# Altium PCB PCB1.PcbDoc
Units mm, origin at the board's own origin, x right, y up, seen from the top; angles counter-clockwise.
Board outline 90.04 x 76.2 mm, 4 copper layers (Top Layer, GND1, GND2, Bottom Layer), stack 0.699 mm thick; 34 components, 32 nets, 135 pads, 37 vias.
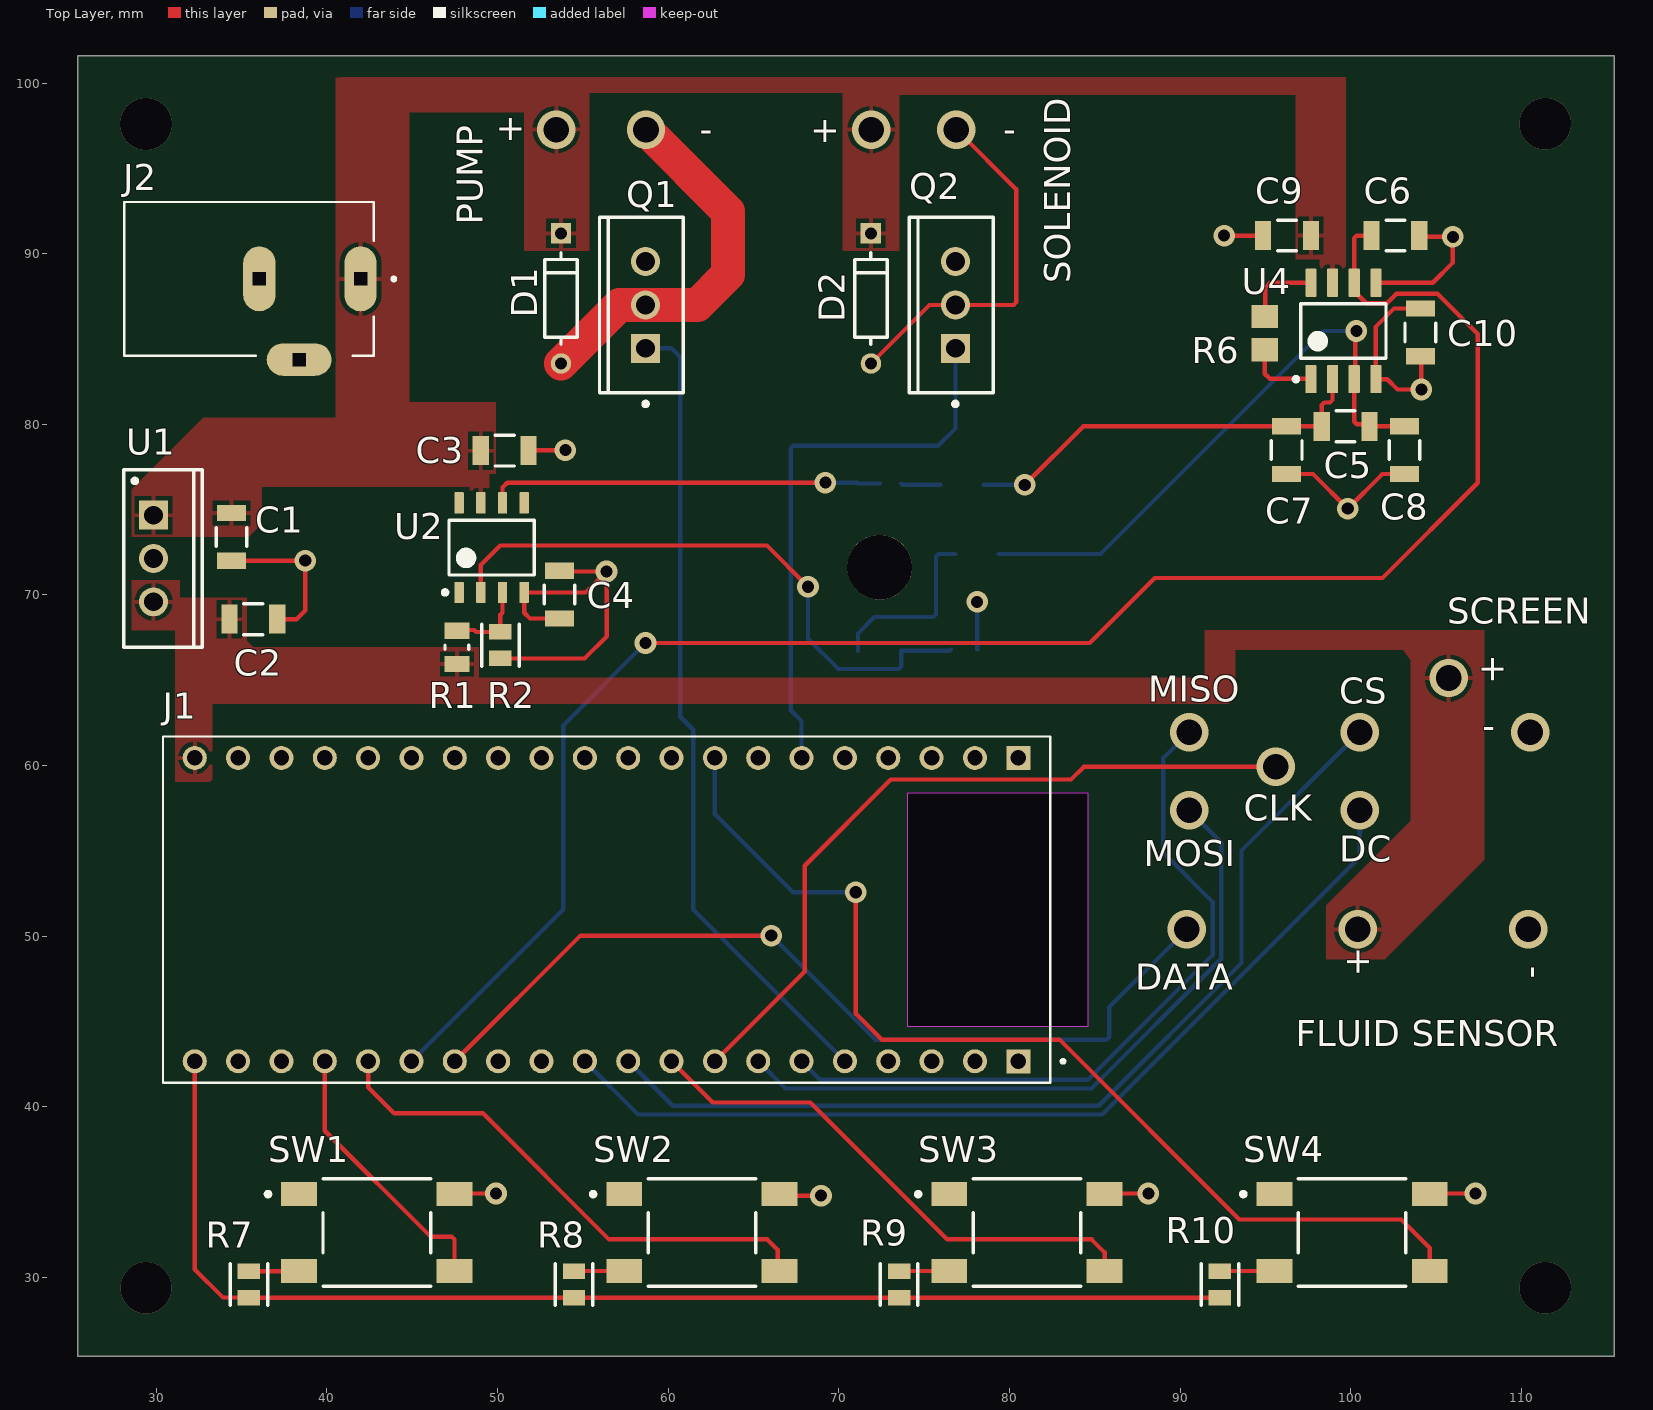
[diagram p0: Top Layer view]
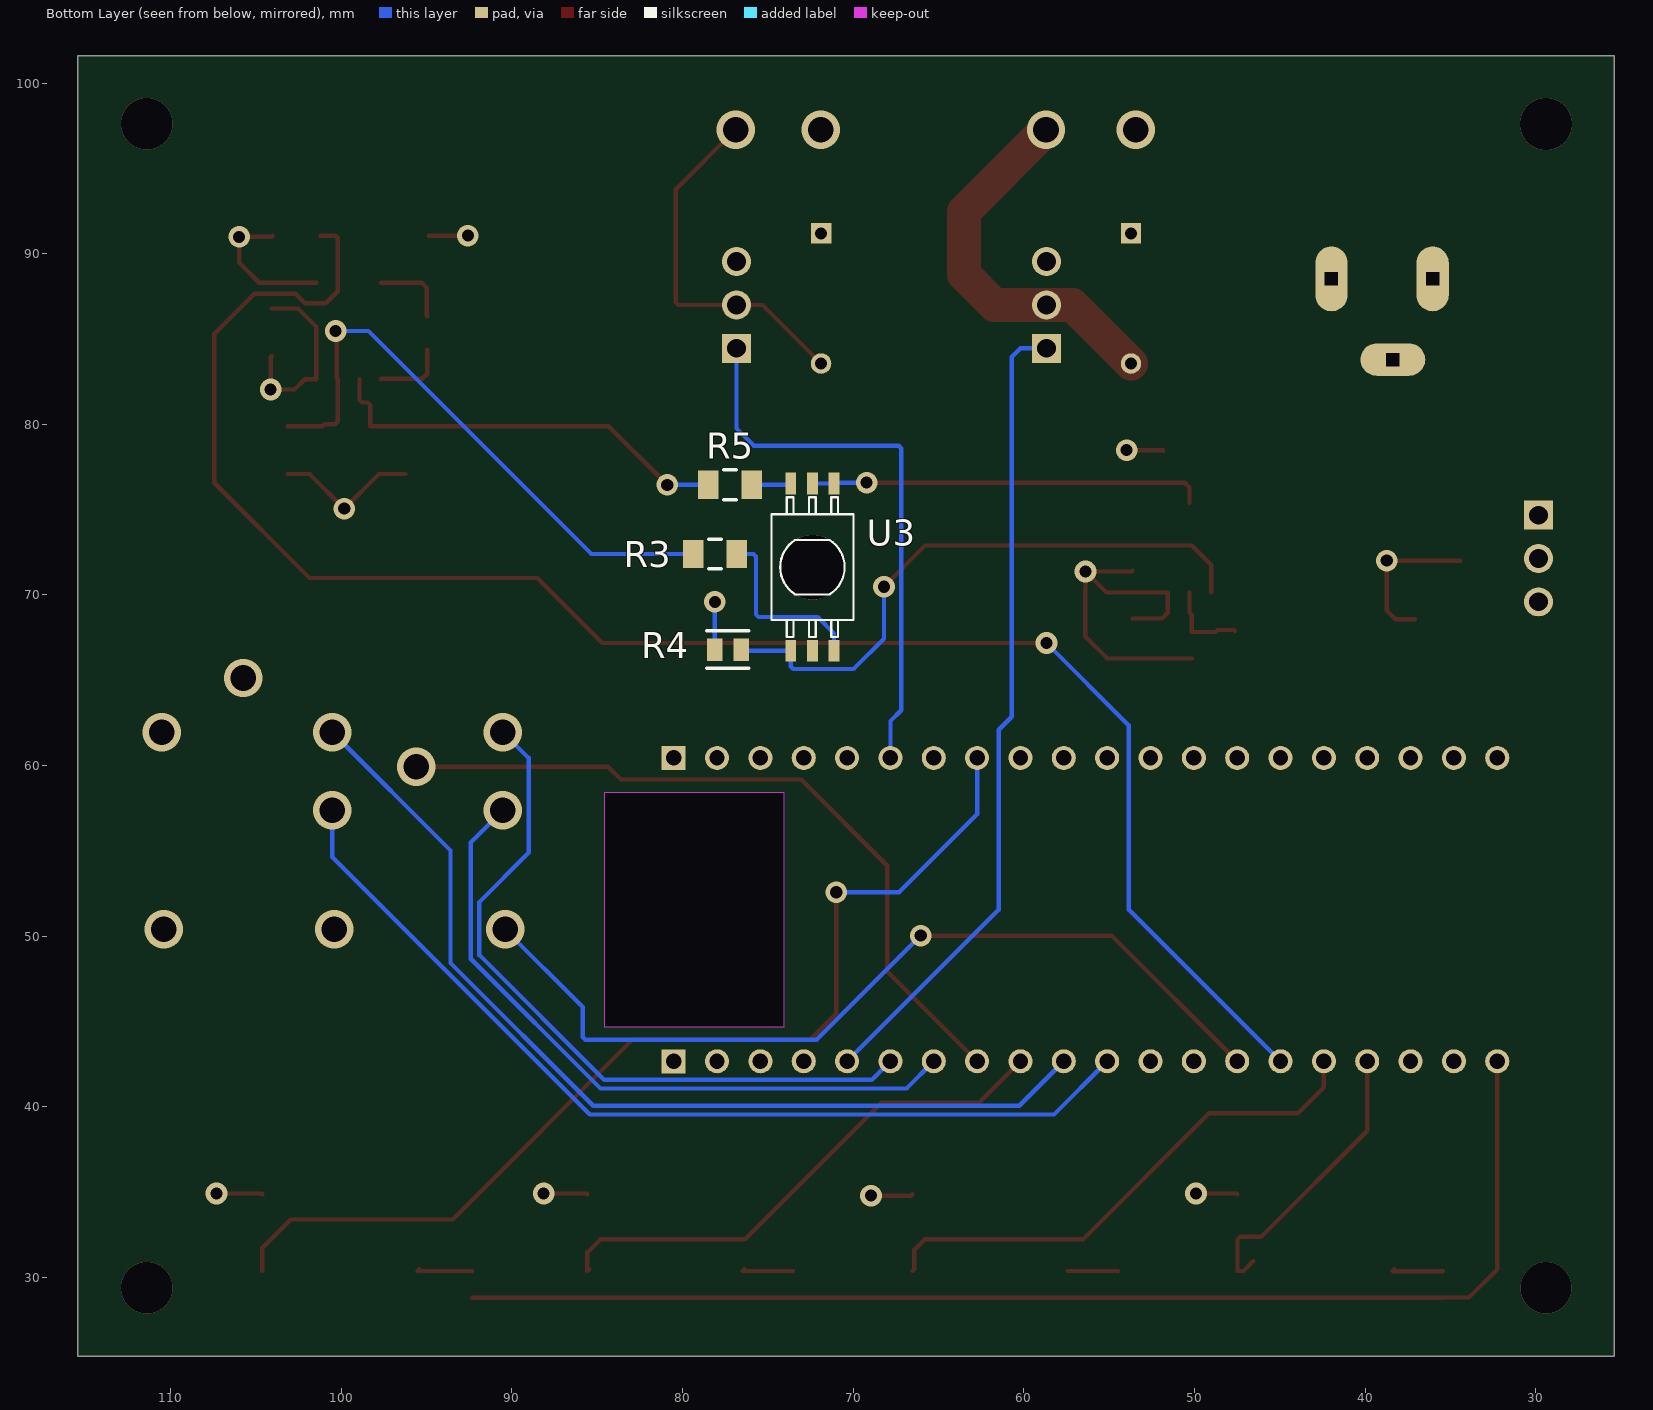
[diagram p1: Bottom Layer view, seen from below]
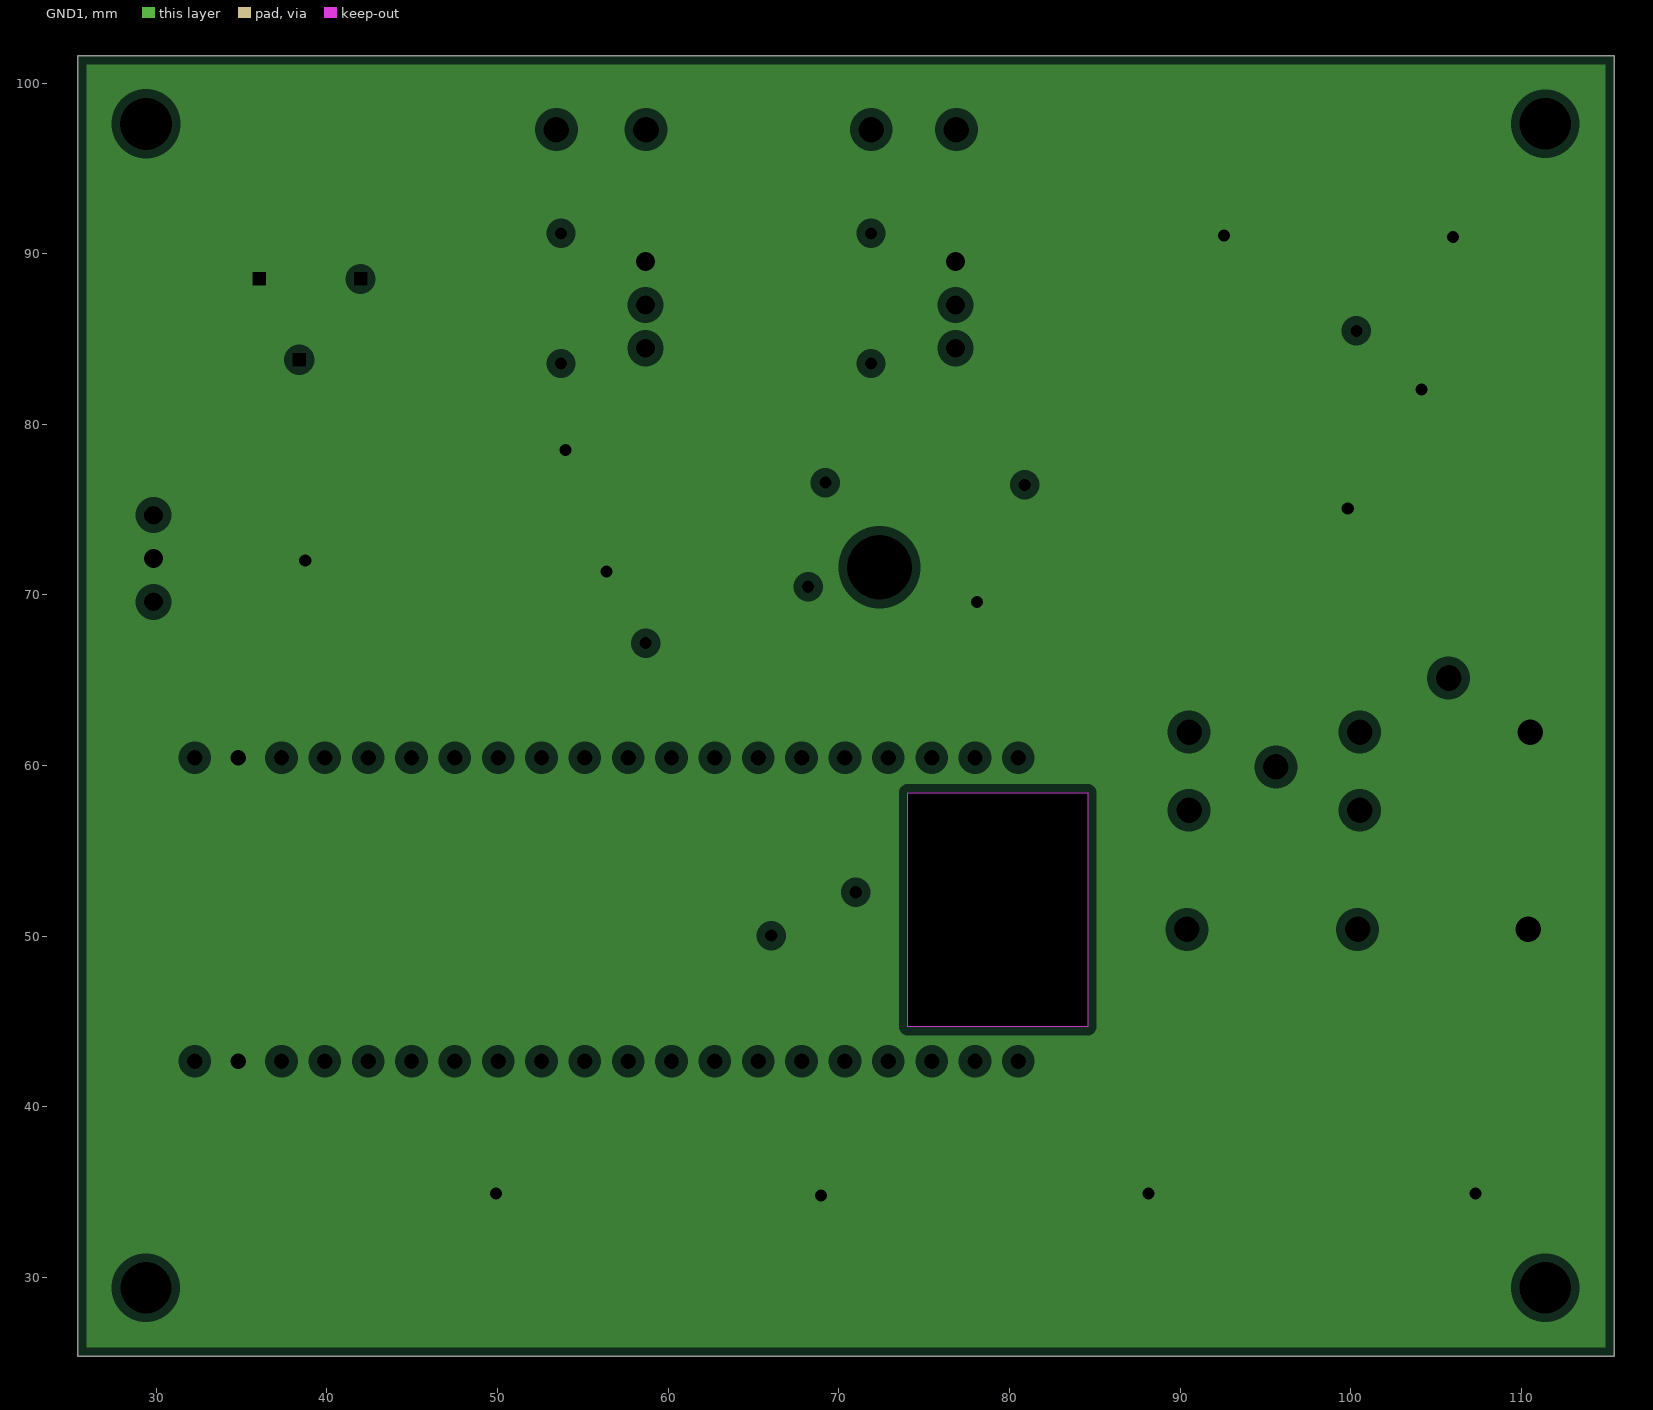
[diagram p2: GND1, clearances drawn from the general rule]
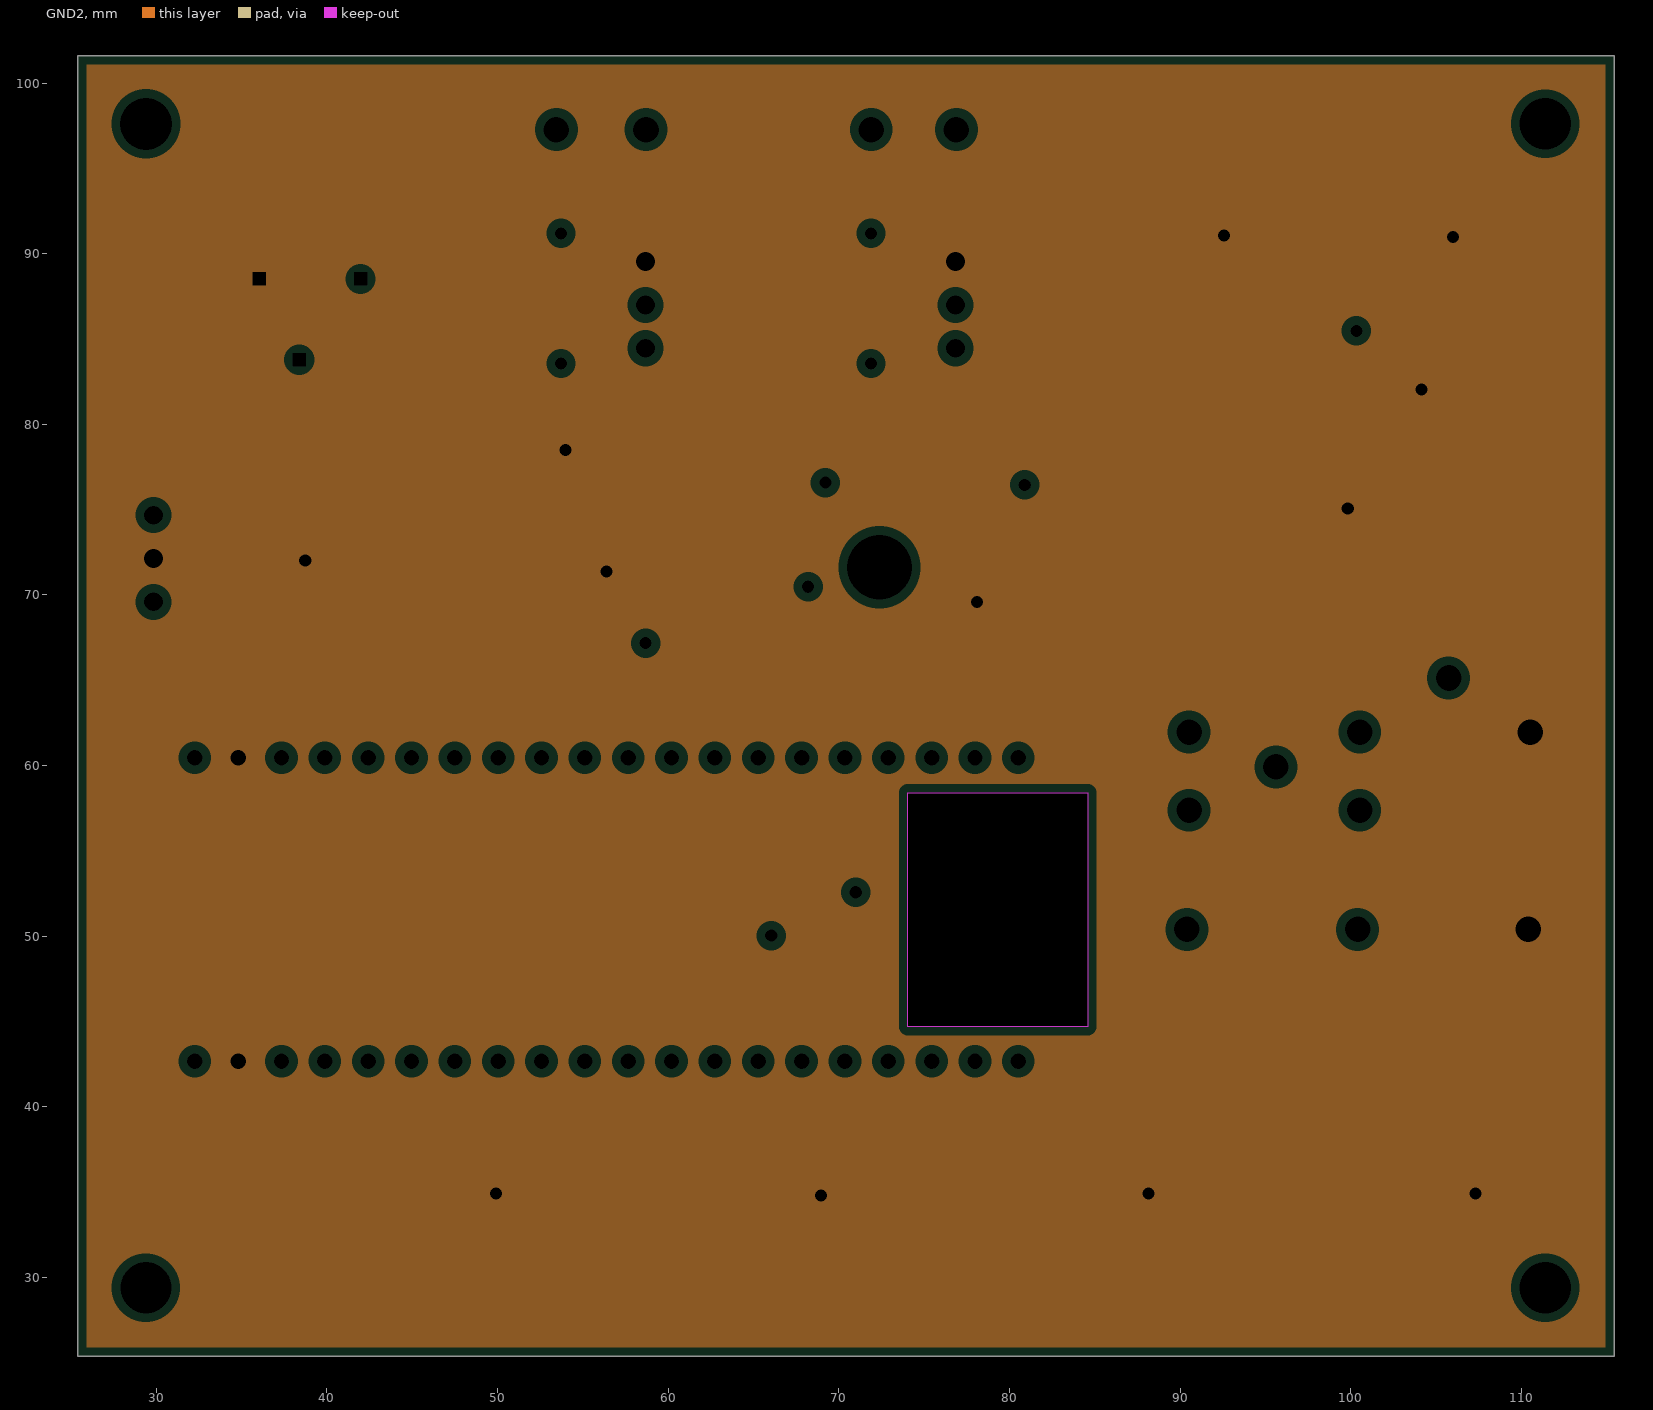
[diagram p3: GND2, clearances drawn from the general rule]
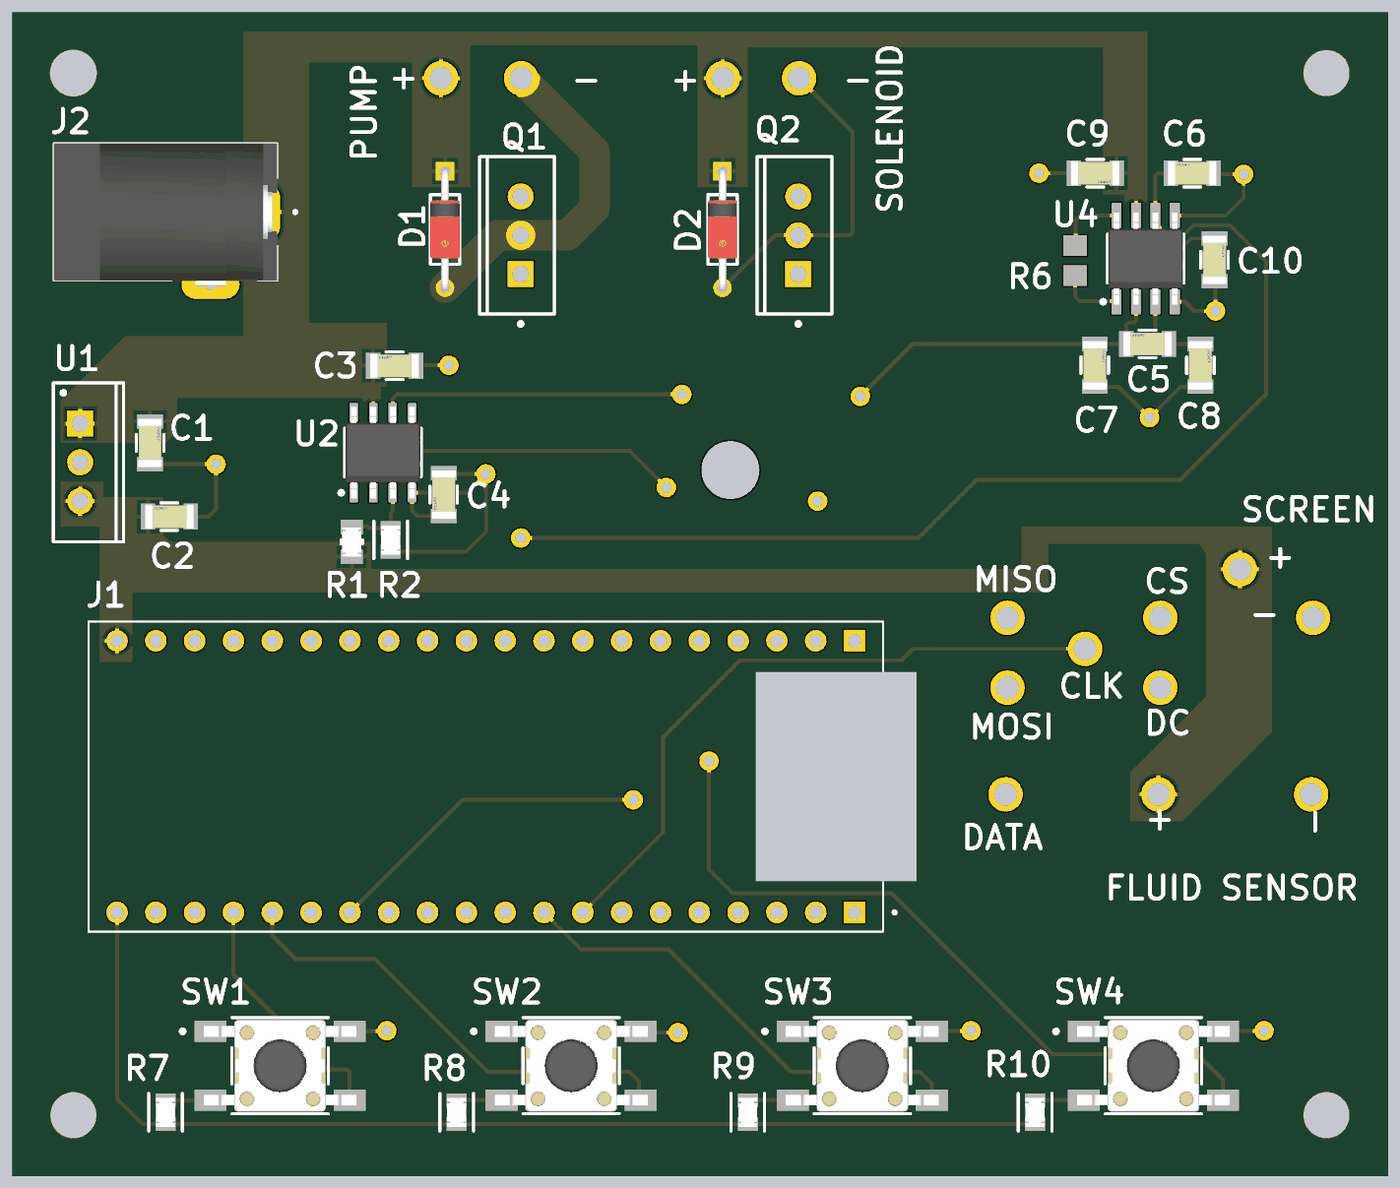
[diagram p4: 3D render of the assembled board from above, using the file's embedded part models]
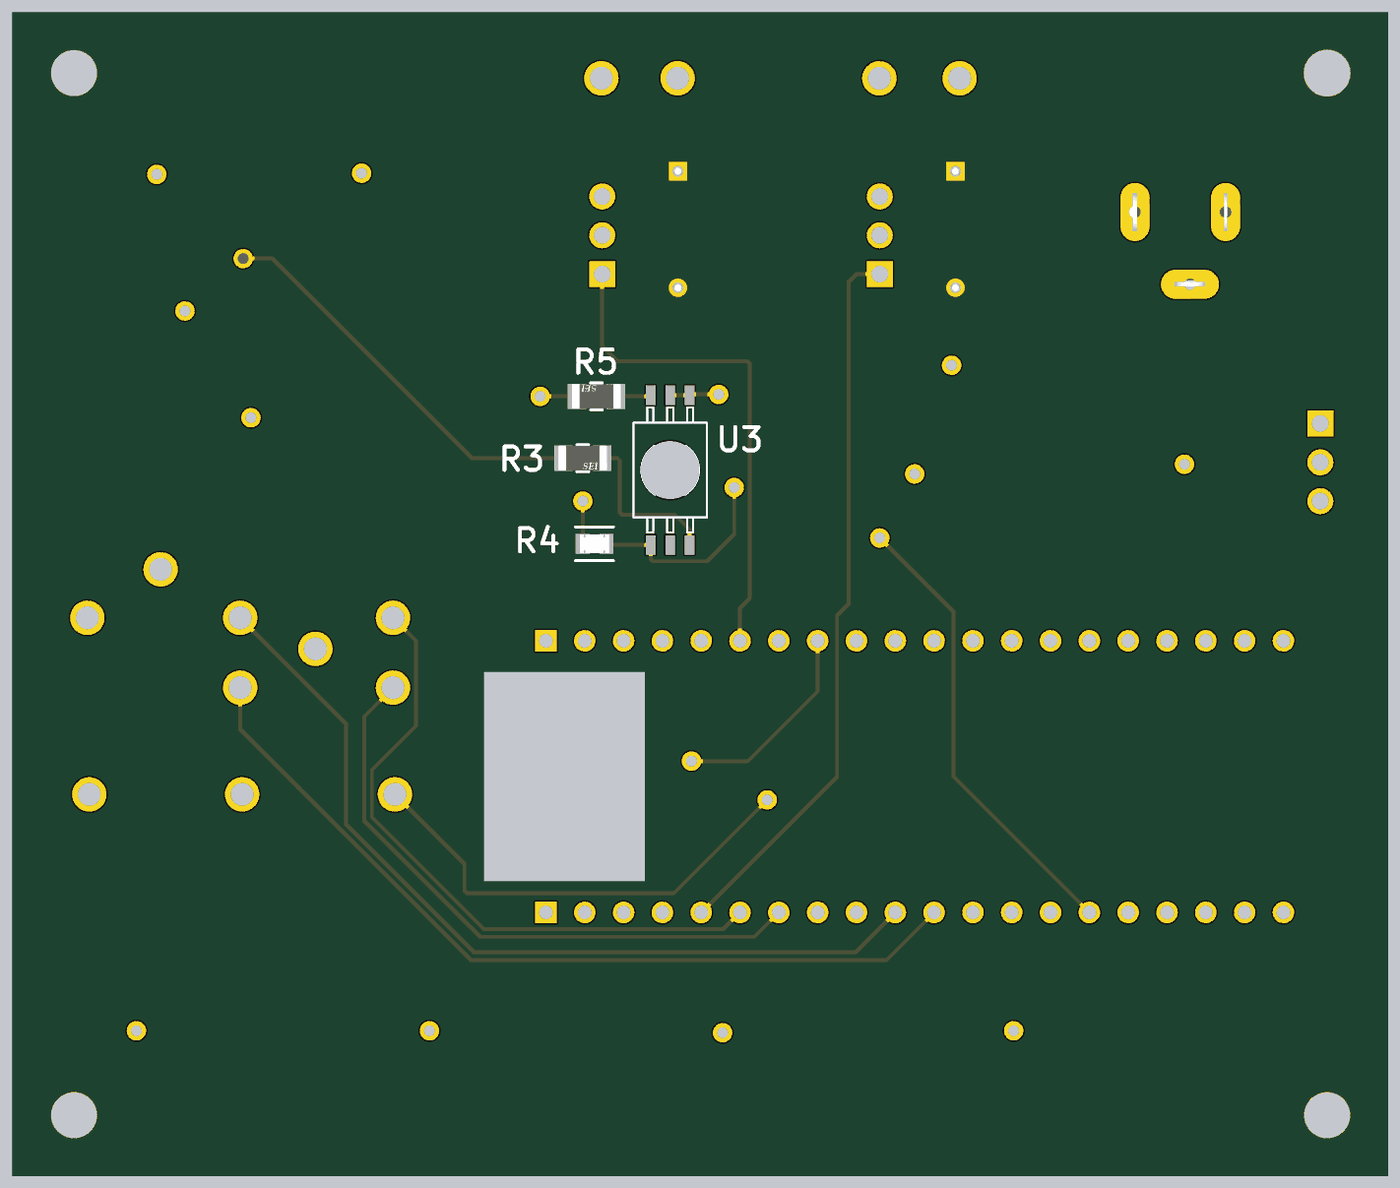
[diagram p5: 3D render of the assembled board from below, using the file's embedded part models]

## Layer stack, top to bottom
Top Solder: solder mask 0.0102, Solder Resist, Dk 3.5
Top Layer: signal copper 0.035
Dielectric 2: prepreg 0.0889, PP-006, Dk 4.1
GND1: plane copper 0.035, net GND
Dielectric 1: core 0.381, FR-4, Dk 4.8
GND2: plane copper 0.035, net GND
Dielectric 3: prepreg 0.0889, PP-006, Dk 4.1
Bottom Layer: signal copper 0.035
Bottom Solder: solder mask 0.0102, Solder Resist, Dk 3.5

## Board outline
25.4,25.4 115.443,25.4 115.443,101.6 25.4,101.6
cut-out: 74.041,58.42 84.582,58.42 84.582,44.704 74.041,44.704

## Design rules (kind name [scope] priority, off if disabled: settings)
Clearance [All] p1: gap=0.254 ignorepadtopadclearanceinfootprint=FALSE
PlaneClearance [All] p1: clearance=0.508
PlaneConnect [All] p1: planeconnectstyle=Relief reliefexpansion=0.508 reliefentries=4 reliefconductorwidth=0.254 reliefairgap=0.254
PolygonConnect [All] p1: connectstyle=Relief reliefconductorwidth=0.254 reliefentries=4 polygonreliefangle="90 Angle" airgapwidth=0.254
RoutingVias [All] p1: holewidth=0.711 width=1.27 viastyle="Through Hole" minholewidth=0.711 minwidth=1.27 maxholewidth=0.711 maxwidth=1.27
SolderMaskExpansion [All] p1: expansion=0.102 istentingtop=FALSE
Width "High Amps" [InNet('PUMP-')] p1: maxlimit=2 minlimit=2 preferedwidth=2 minimp=50.000000 maximp=50.000000 favimp=50.000000
Width Width_1 [All] p2: maxlimit=0.254 minlimit=0.254 preferedwidth=0.254
28 further rules are at their usual default settings.

## Classes and differential pairs
component class 5_AUX: D1 D2 Q1 Q2
component class 4_PushButtons: R7 R8 R9 R10 SW1 SW2 SW3 SW4
component class 3_PressureSensor: C3 C4 C5 C6 C7 C8 C9 C10 R1 R2 R3 R4 R5 R6 U2 U3 U4
component class 2_Power: C1 C2 J2 U1
component class 1_MCU: J1

## Components (designator, comment, footprint, x,y, rotation, side; value= is the part's Value field where it differs from the comment)
C1 "C1206C334K5RACTU" FP-C1206C-EB-MFG 34.417,73.406 r270 top value="0.33 μF"
C2 "C1206C104F3GACTU" FP-C1206C-EB-MFG 35.687,68.58 r0 top value="0.10 μF"
C3 "C1206C104F3GACTU" FP-C1206C-EB-MFG 50.419,78.456 r0 top value="0.10 μF"
C4 "C1206C104F3GACTU" FP-C1206C-EB-MFG 53.636,70.022 r90 top value="0.10 μF"
C5 "C1206C104F3GACTU" FP-C1206C-EB-MFG 99.695,79.883 r0 top value="0.10 μF"
C6 "C1206C103K1RACTU" FP-C1206C-EB-MFG 102.616,91.059 r0 top value="10,000 pF"
C7 "C1206C103K1RACTU" FP-C1206C-EB-MFG 96.241,78.486 r270 top value="10,000 pF"
C8 "C1206C103K1RACTU" FP-C1206C-EB-MFG 103.149,78.486 r270 top value="10,000 pF"
C9 "C1206C104F3GACTU" FP-C1206C-EB-MFG 96.266,91.059 r180 top value="0.10 μF"
C10 "C1206C104F3GACTU" FP-C1206C-EB-MFG 104.079,85.389 r270 top value="0.10 μF"
D1 "1N4148" FP-017AG-MFG 53.721,87.376 r270 top
D2 "1N4148" FP-017AG-MFG 71.882,87.376 r270 top
J1 "ESP32-PICO-KIT-V4.1" XCVR_ESP32-PICO-KIT-V4.1 56.388,51.562 r180 top
J2 "EJ503A" MPD_EJ503A 35.433,88.519 r270 top
Q1 "TIP120G" ONSC-TO-220-3-221A-09 58.674,86.995 r180 top
Q2 "TIP120G" ONSC-TO-220-3-221A-09 76.835,86.995 r180 top
R1 "CRCW080540K0FKEA" FP-CRCW0805-e3-MFG 47.625,66.929 r90 top
R2 "MC01W0805110K" FP-MC01W0805-IPC_C 50.165,67.056 r270 top
R3 "RMCF1206JT200K" FP-RMCF1206-IPC_C 78.105,72.401 r180 bottom
R4 "MC01W0805110K" FP-MC01W0805-IPC_C 77.343,66.802 r0 bottom
R5 "RMCF1206JT200K" FP-RMCF1206-IPC_C 77.216,76.454 r0 bottom
R6 "ERJ-6ENF1021V" RESC2013X70X40ML20T20 94.959,85.344 r90 top
R7 "MC01W0805110K" FP-MC01W0805-IPC_C 35.433,29.591 r90 top
R8 "MC01W0805110K" FP-MC01W0805-IPC_C 54.483,29.591 r90 top
R9 "MC01W0805110K" FP-MC01W0805-IPC_C 73.533,29.591 r90 top
R10 "MC01W0805110K" FP-MC01W0805-IPC_C 92.329,29.591 r90 top
SW1 "1571563-9" FP-1571563-9-MFG 42.926,32.639 r0 top
SW2 "1571563-9" FP-1571563-9-MFG 61.976,32.639 r0 top
SW3 "1571563-9" FP-1571563-9-MFG 81.026,32.639 r0 top
SW4 "1571563-9" FP-1571563-9-MFG 100.076,32.639 r0 top
U1 "L7805CV" TO220 29.845,72.136 r270 top
U2 "TLV2370ID" D0008A_L 49.657,72.771 r90 top
U3 "2SMPP-02" 2SMPP_PAC 72.39,71.628 r180 bottom
U4 "INA121U" D0008A_M 99.568,85.471 r90 top

## Footprints (in the part's own frame and the unit in brackets; to place one, negate y for a bottom-side part, rotate by r counter-clockwise, add the part's x,y. Pads: shape width x height; smd on the part's side, far side on the other; paste and mask are expansions set on the pad)
2SMPP_PAC [mm]
  rect 0.635x1.27 smd: 1(1.27,-4.9) 2(0,-4.9) 3(-1.27,-4.9) 4(-1.27,4.9) 5(0,4.9) 6(1.27,4.9)
  round 3.8 hole 3.8 unplated: ""(0,0)
  silkscreen extent -2.4,-4.1 2.4,4.1
D0008A_L [mm] "SOIC, 8-Leads, Body 5x4mm, Pitch 1.27mm, IPC High Density"
  rrect18% 1.25x0.55 smd: 1(-2.625,1.905) 2(-2.625,0.635) 3(-2.625,-0.635) 4(-2.625,-1.905) 5(2.625,-1.905) 6(2.625,-0.635) 7(2.625,0.635) 8(2.625,1.905)
  silkscreen extent -2.75,-2.5 1.6,2.85, body extent -3,-2.45 3,2.45, height 1.63
D0008A_M [mm] "SOIC, 8-Leads, Body 5x4mm, Pitch 1.27mm, IPC Low Density"
  rrect15% 1.65x0.65 smd: 1(-2.825,1.905) 2(-2.825,0.635) 3(-2.825,-0.635) 4(-2.825,-1.905) 5(2.825,-1.905) 6(2.825,-0.635) 7(2.825,0.635) 8(2.825,1.905)
  silkscreen extent -2.95,-2.5 1.6,2.9, body extent -3,-2.45 3,2.45, height 1.63
FP-017AG-MFG [mm]
  rect 1.2x1.2 hole 0.7 paste-2539.97 mask+0: 1(-3.813,0)
  round 1.2 hole 0.7 paste-2539.97 mask+0: 2(3.813,0)
  silkscreen extent -2.68,-0.95 2.68,0.95, body extent -4.51,-1.05 4.51,1.05, height 0.25
FP-1571563-9-MFG [mm]
  rect 2.1x1.4 smd paste+0 mask+0: 1(-4.55,2.25) 2(4.55,2.25) 3(-4.55,-2.25) 4(4.55,-2.25)
  silkscreen extent -6.5,-3.15 3.15,3.15, body extent -5.7,-3.25 5.7,3.25, height 0.25
FP-C1206C-EB-MFG [mm]
  rect 0.95x1.7 smd paste+0 mask+0: 1(-1.4,0) 2(1.4,0)
  silkscreen extent -0.55,-0.9 0.55,0.9, body extent -2,-1 2,1, height 0.25
FP-CRCW0805-e3-MFG [mm]
  rect 0.95x1.45 smd paste+0 mask+0: 1(-0.975,0) 2(0.975,0)
  silkscreen extent -0.13,-0.7 0.13,0.7, body extent -1.55,-0.82 1.55,0.82, height 0.25
FP-MC01W0805-IPC_C [mm]
  rect 0.906x1.316 smd paste+0 mask+0: 1(-0.776,0) 2(0.776,0)
  silkscreen extent -1.23,-1.1 1.23,1.1, body extent -1.33,-0.8 1.33,0.8, height 0.25
FP-RMCF1206-IPC_C [mm]
  rect 1.204x1.658 smd paste+0 mask+0: 1(-1.276,0) 2(1.276,0)
  silkscreen extent -0.37,-0.87 0.37,0.87, body extent -1.6,-0.8 1.6,0.8, height 0.7
MPD_EJ503A [mm]
  oval 3.8x1.9 hole 0.76 square: 1(0,6.54) 2(0,0.61)
  oval 1.9x3.8 hole 0.76 square: 3(4.73,2.94)
  silkscreen extent -4.5,-7.31 4.5,8.59, body extent -4.5,-7.31 4.88,7.31, height 11
ONSC-TO-220-3-221A-09 [mm] "FM, 3-Leads, Body 10.3x4.85mm, Pitch 2.54mm"
  rect 1.7x1.7 hole 1.1: 1(0,2.54)
  round 1.7 hole 1.1: 2(0,0) 3(0,-2.54)
  silkscreen extent -2.2,-5.15 2.7,5.92, body extent -2.18,-5.15 2.67,5.15, height 19.85
RESC2013X70X40ML20T20 [mm] "Chip Resistor, 2-Leads, Body 2.00x1.25mm, IPC Low Density"
  rect 1.35x1.55 smd: 1(-0.975,0) 2(0.975,0)
  body extent -1.1,-0.72 1.1,0.72, height 0.7
TO220 [mm] "TO, Thru-Hole, Vertical, Heatsink Mounted; 3 In-Line Leads; Pitch 2.54 mm"
  rect 1.7x1.7 hole 1.1: 1(-2.54,0)
  round 1.7 hole 1.1: 2(0,0) 3(2.54,0)
  silkscreen extent -5.2,-1.75 5.2,2.85, body extent -5.25,-1.8 5.25,2.9, height 19.7
XCVR_ESP32-PICO-KIT-V4.1 [mm]
  rect 1.408x1.408 hole 0.9: J2_1(-24.13,8.89) J3_1(-24.13,-8.89)
  round 1.408 hole 0.9: J2_2(-21.59,8.89) J2_3(-19.05,8.89) J2_4(-16.51,8.89) J2_5(-13.97,8.89) J2_6(-11.43,8.89) J2_7(-8.89,8.89) J2_8(-6.35,8.89) J2_9(-3.81,8.89) J2_10(-1.27,8.89) J2_11(1.27,8.89) J2_12(3.81,8.89) J2_13(6.35,8.89) J2_14(8.89,8.89) J2_15(11.43,8.89) J2_16(13.97,8.89) J2_17(16.51,8.89) J2_18(19.05,8.89) J2_19(21.59,8.89) J2_20(24.13,8.89) J3_2(-21.59,-8.89) J3_3(-19.05,-8.89) J3_4(-16.51,-8.89) J3_5(-13.97,-8.89) J3_6(-11.43,-8.89) J3_7(-8.89,-8.89) J3_8(-6.35,-8.89) J3_9(-3.81,-8.89) J3_10(-1.27,-8.89) J3_11(1.27,-8.89) J3_12(3.81,-8.89) J3_13(6.35,-8.89) J3_14(8.89,-8.89) J3_15(11.43,-8.89) J3_16(13.97,-8.89) J3_17(16.51,-8.89) J3_18(19.05,-8.89) J3_19(21.59,-8.89) J3_20(24.13,-8.89)
  silkscreen extent -26.85,-10.15 26,10.15

## Part data
C1: library part CMP-1037-04487-2, "CAP CER 0.33UF 50V X7R 1206", Capacitance="0.33 μF", Manufacturer=KEMET, Package=C1206C-EB, Temperature="-55°C to +150°C", Temperature Characteristic=X7R, Temperature Coefficient=15%, Temperature Range High=+150°C, Temperature Range Low=-55°C, Tolerance=0.1, Voltage Rating="50 V", Automotive=Yes, Automotive Grade="Grade 0", Category=Cap, ComponentLink2Description=Datasheet, ComponentLink2URL=https://content.kemet.com/datasheets/KEM_C1007_X8R_ULTRA_150C_SMD.pdf, Device Class L1="Passive Components", Device Class L2=Capacitors, Device Class L3="Ceramic Capacitors", Digikey Description="CAP CER 0.33UF 50V X7R 1206", Height=0.88mm, Ipc Land Pattern Name=CAPC320160X78, Lead Free=Yes, Manufacturer Part Number=C1206C334K5RACTU, Material=Ceramic, Mouser Description="Multilayer Ceramic Capacitors MLCC - SMD/SMT 50volts 0.33uF X7R 10%", Octopart=https://octopart.com/c1206c334k5ractu-kemet-146059, RoHS=TRUE
C2 C3 C4 C5 C9 C10: library part CMP-1037-04186-2, "CAP CER 0.1UF 25V C0G/NP0 1206", Capacitance="0.10 μF", Manufacturer=KEMET, Package=C1206C-EB, Temperature="-55°C to +150°C", Temperature Characteristic=C0G, Temperature Coefficient=15%, Temperature Range High=+150°C, Temperature Range Low=-55°C, Tolerance=0.01, Voltage Rating="25 V", Automotive=Yes, Automotive Grade="Grade 0", Category=Cap, ComponentLink2Description=Datasheet, ComponentLink2URL=https://content.kemet.com/datasheets/KEM_C1007_X8R_ULTRA_150C_SMD.pdf, Device Class L1="Passive Components", Device Class L2=Capacitors, Device Class L3="Ceramic Capacitors", Digikey Description="CAP CER 0.1UF 25V C0G/NP0 1206", Height=0.88mm, Ipc Land Pattern Name=CAPC320160X78, Lead Free=Yes, Manufacturer Part Number=C1206C104F3GACTU, Material=Ceramic, Mouser Description="Multilayer Ceramic Capacitors MLCC - SMD/SMT 25volts 0.1uF 1% C0G", Octopart=https://octopart.com/c1206c104f3gactu-kemet-13149870, RoHS=TRUE
C6 C7 C8: library part CMP-03020-021723-1, "Cap Ceramic 0.01uF 100V X7R 10% SMD 1206 125°C Plastic T/R", Capacitance="10,000 pF", Manufacturer=KEMET, Package=C1206C-EB, Temperature="-55°C to +150°C", Temperature Characteristic=X7R, Temperature Coefficient=15%, Temperature Range High=+150°C, Temperature Range Low=-55°C, Tolerance=0.1, Voltage Rating="100 V", Automotive=Yes, Automotive Grade="Grade 0", Category=Cap, ComponentLink2Description=Datasheet, ComponentLink2URL=https://content.kemet.com/datasheets/KEM_C1007_X8R_ULTRA_150C_SMD.pdf, Device Class L1="Passive Components", Device Class L2=Capacitors, Device Class L3="Ceramic Capacitors", Digikey Description="Cap Ceramic 0.01uF 100V X7R 10% SMD 1206 125°C Plastic T/R", Height=0.88mm, Ipc Land Pattern Name=CAPC320160X78, Lead Free=Yes, Manufacturer Part Number=C1206C103K1RACTU, Material=Ceramic, Mouser Description="Multilayer Ceramic Capacitors MLCC - SMD/SMT 100volts 10000pF X7R 10%", Octopart=https://octopart.com/c1206c103k1ractu-kemet-117927, RoHS=TRUE
D1 D2: library part CMP-07163-000046-1, "DIODE GEN PURP 100V 200MA DO35", Average Rectified Current=200mA, Capacitance=4pF, Case/Package=DO-35, Current=4A, Forward Current=300mA, Forward Voltage=1V, Max Forward Surge Current (Ifsm)=1A, Max Operating Temperature=175°C, Max Power Dissipation=500mW, Max Repetitive Reverse Voltage (Vrrm)=100V, Max Reverse Current=5uA, Min Operating Temperature=-65°C, Package Quantity=2000, Contact Plating=Tin, Current Rating=200mA, Diameter=1.91mm, Element Configuration=Single, Height=4.56mm, Lead Free="Lead Free", Length=4.56mm, Max Reverse Voltage (DC)=100V, Max Surge Current=4A, Mount="Through Hole", Number of Pins=2, Output Current=200mA, Outside Diameter=1.85mm, Packaging=Bulk, Peak Non-Repetitive Surge Current=4A, Polarity=Standard, Power Dissipation=500mW, Radiation Hardening=No, REACH SVHC="No SVHC", Recovery Time=4ns, Reverse Recovery Time=4ns, Reverse Voltage=100V, Series=-, Voltage=100V, Voltage Rating (DC)=100V, Weight=0.01lb, Width=1.91mm
J1: library part CMP-003-000001-1, "WiFi Development Tools (802.11)", Package=None, Availability=Bad, Check_prices=https://www.snapeda.com/parts/ESP32-PICO-KIT-V4.1/Espressif%20Systems/view-part/3211113/?ref=eda, Component Type=Standard, Design Item ID=ESP32-PICO-KIT-V4.1, MF="Espressif Systems", MP=ESP32-PICO-KIT-V4.1, Pin Count=40, Price=None, SnapEDA_Link=https://www.snapeda.com/parts/ESP32-PICO-KIT-V4.1/Espressif%20Systems/view-part/3211113/?ref=snap, Source=ESP32-PICO-KIT-V4.1.SchLib
J2: library part CMP-002-00071-1, "Power Barrel Connector Jack 2.10mm ID (0.083), 5.50mm OD (0.217) Through Hole, Right Angle", Case/Package=None, Availability="In Stock", Check_prices=https://www.snapeda.com/parts/EJ503A/MPD+%2528Memory+Protection+Devices%2529/view-part/?ref=eda, Component Type=Standard, Design Item ID=EJ503A, MF=MPD, MP=EJ503A, Pins=3, Price=None, Purchase-URL=https://pricing.snapeda.com/search?q=EJ503A&ref=eda, SnapEDA_Link=https://www.snapeda.com/parts/EJ503A/MPD+%2528Memory+Protection+Devices%2529/view-part/?ref=snap, Source=EJ503A.SchLib
Q1 Q2: library part CMP-1047-00134-1, "Plastic Medium-Power, Complementary Silicon Transistor, 3-Pin TO-220, Pb-Free, Tube", Manufacturer="On Semiconductor", ComponentLink1Description="Manufacturer URL", ComponentLink1URL=http://www.onsemi.com/, ComponentLink2Description=Datasheet, ComponentLink2URL=http://www.onsemi.cn/pub_link/Collateral/TIP120-D.PDF, ComponentLink3Description="Package Specification", ComponentLink3URL=http://www.onsemi.com/pub_link/Collateral/221A-09.PDF, DatasheetVersion="Rev. 8", IC Continuous (A)=5, Mounting Technology="Through Hole", PackageDescription="3-Pin Flange Mount, Vertical Straight Lead, Body 9.97 x 4.445 mm, Pitch 2.54 mm", PackageReference=TO-220-3-221A-09, PackageVersion="Rev. AG, 09/2011", Packing=Tube, PartNumber=TIP120G, Polarity=NPN, RoHS=TRUE
R1: library part CMP-02407-003498-1, "RES Thick Film, 40kΩ, 1%, 0.125W, 100ppm/°C, 0805", Case/Package=0805, Max Operating Temperature=155°C, Max Power Dissipation=125mW, Min Operating Temperature=-55°C, Package Quantity=5000, Resistance=40kR, Temperature Coefficient=100ppm/°C, Tolerance=1%, Composition="Thick Film", Features="Automotive AEC-Q200", Height=0.02inch, Lead Free="Lead Free", Length=0.079inch, Number of Terminations=2, Packaging="Tape and Reel", Width=0.049inch
R2 R4 R7 R8 R9 R10: library part CMP-12256-000003-1, "Resistor, 10K, 0.1W, 1%, 0805, Reel", Case Code (Imperial)=0805, Case Code (Metric)=2012, Max Operating Temperature=155°C, Min Operating Temperature=-55°C, Power Rating=100mW, Resistance=10kR, Temperature Coefficient=100ppm/°C, Tolerance=1%, Voltage Rating=150V, Case/Package=0805, Composition="Thick Film", Number of Pins=2, Packaging="Cut Tape", REACH SVHC="No SVHC", Voltage Rating (DC)=150V, Width=1.25mm
R3 R5: library part CMP-26527-005036-1, "200kΩ ±5% 0.25W 1206 Thick Film Chip Resistor AEC-Q200 compliant", Case Code (Imperial)=1206, Case Code (Metric)=3216, Max Operating Temperature=155°C, Max Power Dissipation=250mW, Min Operating Temperature=-55°C, Resistance=200kR, Resistor Type="Thick Film", Temperature Coefficient=200ppm/°C, Tolerance=5%, Case/Package=1206, Construction=Rectangular, Contact Plating=Tin, Depth=1.6mm, Features="Automotive AEC-Q200", Height=0.028inch, Lead Free="Lead Free", Length=0.126inch, Military Standard=Not, Mount="Surface Mount", Number of Terminations=2, Packaging="Tape and Reel", Power Rating=250mW, Radiation Hardening=No, RoHS Compliant=Yes, Series=RMCF, Size Code=1206, Width=0.063inch
R6: library part CMP-2001-04380-1, Manufacturer=Panasonic, Part Number=ERJ-6ENF1021V
SW1 SW2 SW3 SW4: library part CMP-03402-000005-1, "SWITCH TACTILE SPST-NO 0.05A 24V", Contact Current Rating=50mA, Contact Resistance=100mΩ, Manufacturer="TE Connectivity", Operating Force=160gf, Package=SMT_SW_6MM0_6MM0, Temperature="-35°C to +85°C", Temperature Range High=+85°C, Temperature Range Low=-35°C, Voltage Rating Dc=24V, Automotive=No, Category=Switch, ComponentLink2Description=Datasheet, ComponentLink2URL=https://www.te.com/commerce/DocumentDelivery/DDEController?Action=showdoc&DocId=Customer+Drawing%7F2-1437565-7%7FV%7Fpdf%7FEnglish%7FENG_CD_2-1437565-7_V.pdf%7F1571563-9, Device Class L1=Electromechanical, Device Class L2=Switches, Device Class L3="Pushbutton Switches", Digikey Description="SWITCH TACTILE SPST-NO 0.05A 24V", Electromechanical Life=100000Cycles, Height=9.75mm, Lead Free=Yes, Manufacturer Part Number=1571563-9, Mount="Surface Mount", Mouser Description="Tactile Switches SPST OFF(ON) RND SMT MINI PB TACT SWITCH", Octopart=https://octopart.com/1571563-9-te+connectivity-41253969, RoHS=TRUE, Standoff Height=0.05mm, Throw Configuration=SPST-NO
U1: library part CMP-0244-00483-1, "Positive Voltage Regulator, 5V, 3-Pin TO-220", ComponentLink1Description="Manufacturer URL", ComponentLink1URL=http://www.st.com, ComponentLink2Description=Datasheet, ComponentLink2URL=http://www.st.com/internet/com/TECHNICAL_RESOURCES/TECHNICAL_LITERATURE/DATASHEET/CD00000444.pdf, ComponentLink3Description="Package Specification", ComponentLink3URL=http://www.st.com/internet/com/TECHNICAL_RESOURCES/TECHNICAL_LITERATURE/PACKAGE_INFORMATION/CD00004649.pdf, DatasheetVersion=16/11/2011, PackageDescription="TO, Thru-Hole, Vertical, Heatsink Mounted; 3 In-Line Leads; Pitch 2.54 mm", PackageReference=TO220, PackageVersion=ver3.0
U2: library part CMP-0272-03086-3, "550 uA/Ch, 3 MHz, RRIO Operational Amplifier with Shutdown, 2.7 to 16 V, -40 to 125 degC, 8-pin SOIC (D8), Green (RoHS & no Sb/Br)", Manufacturer="Texas Instruments", Rating=Catalog, Total Supply Voltage(Max)(+5V is 5, +/-5V is 10)=16, Total Supply Voltage(Min)(+5V is 5, +/-5V is 10)=2.7, CMRR(Min)(dB)=50, Code_JEDEC=MS-012, ComponentLink1Description="Manufacturer URL", ComponentLink1URL=http://www.ti.com/, ComponentLink2Description=Datasheet, ComponentLink2URL=http://www.ti.com/lit/ds/symlink/tlv2370.pdf, ComponentLink3Description="Package Specification", ComponentLink3URL=http://www.ti.com/litv/pdf/msoi002j, DatasheetVersion=SLOS270D, Eco-Plan="Green (RoHS & no Sb/Br)", GBW(Typ)(MHz)=3, IIB(Max)(pA)=60, Iq per channel(Max)(mA)=0.9, Mounting Technology="Surface Mount", Number of Channels=1, Offset Drift(Typ)(uV/C)=2, PackageDescription="8-Pin Plastic Small Outline, Body 4.9 x 3.9 mm, Pitch 1.27 mm", PackageReference=D0008A, PackageVersion="4040047-3/M, 06/2011", Packing=TUBE, PartNumber=TLV2370ID, Slew Rate(Typ)(V/us)=2.4, Sub Family="Low Supply Voltage Amplifier (<=2.7V), Precision Amplifier", Vio (25C)(Max)(mV)=4.5
U3: library part CMP-007-000000-1, "Pressure Sensor 5.37PSI _37kPa_ Vented Gauge Male - 0.1 _2.59mm_ Tube 0 mV ~ 31 mV 6-SMD Module", Package="SMD-6 Omron", Availability=Unavailable, Component Type=Standard, Design Item ID=2SMPP-02, MF=Omron, MP=2SMPP-02, Pin Count=6, Price=None, SnapEDA_Link=https://www.snapeda.com/parts/2SMPP-02/Omron%20Electronics%20Inc-EMC%20Div/view-part/384453/?ref=snap, Source=SnapEDAsch.SchLib
U4: library part CMP-0992-00043-2, "FET-Input, Low Power Instrumentation Amplifier, -40 to 85 degC, 8-pin SOIC (D8), Green (RoHS & no Sb/Br)", Input Bias Current (+/-)(Max)(nA)=0.05, Manufacturer="Texas Instruments", Quiescent Current (+/-)(Typ)(mA)=0.45, CMRR(Min)(dB)=96, Code_JEDEC=MS-012, ComponentLink1Description="Manufacturer URL", ComponentLink1URL=http://www.ti.com/, ComponentLink2Description=Datasheet, ComponentLink2URL=http://www.ti.com/general/docs/lit/getliterature.tsp?genericPartNumber=INA121&fileType=pdf, ComponentLink3Description="Package Specification", ComponentLink3URL=http://www.ti.com/litv/pdf/msoi002j, DatasheetVersion=SBOS078, Eco-Plan="Green (RoHS & no Sb/Br)", Gain(V/V)="1 to 10000", Input Offset (+/-)(Max)(uV)=500, Input Offset Drift (+/-)(Max)(uV/Degrees Celsius)=5, Mounting Technology="Surface Mount", Noise at 1kHz(Typ)(nV/rt(Hz))=20, Non-Linearity (+/-)(Max)(%)=0.005, Number of Channels=1, Output Offset (+/-)(Max)(uV)=500/G, Output Offset Drift (+/-)(Max)(uV/Degrees Celsius)=20/G, PackageDescription="8-Pin Plastic Small Outline, Body 4.9 x 3.9 mm, Pitch 1.27 mm", PackageReference=D0008A, PackageVersion="4040047-3/M, 06/2011", PartNumber=INA121U, SubFamily="Dual Supply", Vs(Max)(V)=36, Vs(Min)(V)=4.5

## Via types
v1: diameter 1.27, hole 0.711, Top Layer to Bottom Layer, 19 vias
v2: diameter 2.25, hole 1.5, Top Layer to Bottom Layer, 14 vias
v3: diameter 3, hole 3, Top Layer to Bottom Layer, 3 vias
v4: diameter 3.048, hole 3.048, Top Layer to Bottom Layer, 1 vias

## Nets (pads, with @x,y where several pads share a name; then routed paths per layer and width w, separated by ;. In a path a pad name is that pad's centre, name@x,y a point inside that pad or via, vN(x,y) a via of type N, cw(c..) or ccw(c..) an arc to the next point about the centre after c; other vN are vias at no path point)
3V3: J1.J2_20 R7.1 R8.1 R9.1 R10.1 | length 73
  Top Layer w0.254: J1.J2_20 32.258,30.48 33.909,28.829 35.419,28.829 R7.1 R8.1 R9.1 R10.1
5V_IN: C2.1 J1.J3_20 R1.1 U1.3
  other v2: 100.4,50.4 105.734,65.132
12V_IN: C1.1 C3.1 C9.1 D1.1 D2.1 J2.1 U1.1 U2.7 U4.7
  other v2: 53.448,97.273 71.901,97.273
AMP+: C5.2 C8.1 R3.1 U4.3 | length 34.8
  Top Layer w0.254: v1(100.33,85.471) 100.266,85.407 100.266,82.709 U4.3 100.203,80.159 100.352,80.01 100.968,80.01 C5.2 101.098,79.886 C8.1
  Bottom Layer w0.254: R3.1 85.341,72.401 98.411,85.471 v1(100.33,85.471)
AMP-: C5.1 C7.1 R5.2 U4.2 | length 24.5
  Top Layer w0.254: v1(80.899,76.454) 84.331,79.886 C7.1 96.244,79.883 C5.1 98.298,79.886 98.298,81.131 98.447,81.28 98.784,81.28 98.933,81.429 U4.2
  Bottom Layer w0.254: R5.2 v1(80.899,76.454)
CLK: J1.J2_8 | length 43.6
  Top Layer w0.254: J1.J2_8 68.003,47.937 68.003,54.138 73.047,59.182 83.611,59.182 84.354,59.925 v2(95.607,59.925)
CS: J1.J2_10 | length 56.9
  Bottom Layer w0.254: J1.J2_10 60.267,40.063 85.228,40.063 93.599,48.434 93.599,55.029 v2(100.527,61.957)
DC: J1.J2_11 | length 55.7
  Bottom Layer w0.254: J1.J2_11 58.235,39.555 85.438,39.555 100.527,54.644 v2(100.527,57.385)
FLUID_DATA: J1.J2_14 | length 52.2
  Top Layer w0.254: J1.J2_14 54.864,50.038 v1(66.04,50.038)
  Bottom Layer w0.254: v1(66.04,50.038) 72.136,43.942 85.703,43.942 85.852,44.091 85.852,45.852 v2(90.4,50.4)
GND: C1.2 C2.2 C3.2 C4.1 C4.2 C6.2 C7.2 C8.2 C9.2 C10.1 C10.2 J1.J2_19 J1.J3_19 J2.2 Q1.3 Q2.3 R2.2 R4.2 SW1.2 SW2.2 SW3.2 SW4.2 U1.2 U2.4 U4.4 U4.5 | length 76.9
  Top Layer w0.254: U1.2@29.781,72.072 U1.2 ; C1.2 34.42,72.009 v1(38.735,72.009) 38.735,69.088 38.227,68.58 C2.2 ; SW1.2 47.512,34.925 v1(49.911,34.925) ; R2.2 55.104,66.28 56.41,67.586 56.41,70.25 56.388,70.272 v1(56.388,71.374) ; C3.2 51.849,78.486 v1(53.975,78.486) ; C4.1 51.901,68.622 51.562,68.961 U2.4 55.16,70.146 v1(56.388,71.374) ; C4.2 53.685,71.374 v1(56.388,71.374) ; SW2.2 66.617,34.798 v1(68.961,34.798) ; SW3.2 85.612,34.925 v1(88.138,34.925) ; v1(92.583,91.059) C9.2 ; C7.2 96.244,77.089 97.79,77.089 v1(99.822,75.057) 101.854,77.089 103.146,77.089 C8.2 ; U4.5 104.806,88.296 105.986,89.476 v1(105.986,90.984) 104.091,90.984 C6.2 ; C10.2 104.14,83.928 v1(104.14,82.042) 102.743,82.042 102.139,82.646 U4.4 101.473,85.725 102.537,86.789 C10.1 ; SW4.2 104.662,34.925 v1(107.315,34.925)
  Bottom Layer w0.254: v1(78.105,69.596) 78.105,66.816 R4.2
  other v2: 110.4,50.4 110.527,61.957
MISO: J1.J2_6 | length 42.4
  Bottom Layer w0.254: J1.J2_6 68.903,41.587 84.596,41.587 91.906,48.897 91.906,52.01 89.021,54.895 89.021,60.451 v2(90.527,61.957)
MOSI: J1.J2_7 | length 40.4
  Bottom Layer w0.254: J1.J2_7 66.871,41.079 84.807,41.079 92.414,48.686 92.414,55.498 v2(90.527,57.385)
NetJ1_J2_5: J1.J2_5 Q1.1 | length 47.5
  Bottom Layer w0.254: Q1.1 60.198,84.455 60.706,83.947 60.706,62.865 61.468,62.103 61.468,51.562 J1.J2_5
NetJ1_J2_9: J1.J2_9 SW3.4 | length 31.2
  Top Layer w0.254: J1.J2_9 62.611,40.259 68.326,40.259 76.349,32.236 84.814,32.236 85.576,31.474 SW3.4 SW3.4@85.471,30.494
NetJ1_J2_16: J1.J2_16 SW2.4 | length 30.7
  Top Layer w0.254: J1.J2_16 42.418,41.148 43.942,39.624 49.149,39.624 56.537,32.236 65.808,32.236 66.421,31.623 66.421,30.494 SW2.4
NetJ1_J2_17: J1.J2_17 SW1.4 | length 17.3
  Top Layer w0.254: J1.J2_17 39.878,38.608 46.101,32.385 47.327,32.385 47.476,32.236 SW1.4 47.126,30.389 SW1.4@46.553,30.962
NetJ1_J3_6: J1.J3_6 Q2.1 | length 33.2
  Bottom Layer w0.254: J1.J3_6 67.818,62.611 67.183,63.246 67.183,78.591 67.332,78.74 75.819,78.74 76.835,79.756 Q2.1
NetJ1_J3_8: J1.J3_8 SW4.4 | length 61.5
  Top Layer w0.254: v1(70.993,52.578) 70.993,45.466 72.517,43.942 82.931,43.942 93.472,33.401 102.953,33.401 104.626,31.728 SW4.4
  Bottom Layer w0.254: J1.J3_8 62.738,57.15 67.31,52.578 v1(70.993,52.578) v1@70.799,52.772
NetR1_2: R1.2 R2.1 U2.3 | length 5
  Top Layer w0.254: R1.2 47.666,67.945 48.641,67.945 48.754,67.832 R2.1 50.165,68.834 50.292,68.961 U2.3
NetR3_2: R3.2 U3.1 | length 10.6
  Bottom Layer w0.254: U3.1 71.12,67.744 72.083,68.707 75.543,68.707 75.692,68.856 75.692,72.252 75.841,72.401 R3.2
NetR5_1: R5.1 U3.4 | length 2.3
  Bottom Layer w0.254: U3.4 73.734,76.454 R5.1
NetR6_1: R6.1 U4.1 | length 4.2
  Top Layer w0.254: R6.1 94.959,82.968 95.25,82.677 97.632,82.677 U4.1
NetR6_2: R6.2 U4.8 | length 4.5
  Top Layer w0.254: R6.2 94.996,86.356 94.996,88.011 95.281,88.296 U4.8
NetR7_2: R7.2 SW1.3 | length 3.1
  Top Layer w0.254: R7.2 38.354,30.367 SW1.3 SW1.3@38.285,30.48
NetR8_2: R8.2 SW2.3 | length 3
  Top Layer w0.254: R8.2 54.505,30.389 SW2.3
NetR9_2: R9.2 SW3.3 | length 3.1
  Top Layer w0.254: R9.2 73.555,30.389 SW3.3 SW3.3@76.385,30.48
NetR10_2: R10.2 SW4.3 | length 3.3
  Top Layer w0.254: R10.2 92.351,30.389 SW4.3 SW4.3@95.435,30.48
Pressure-CNT: U2.6 U3.5 U3.6 | length 23.1
  Top Layer w0.254: U2.6 50.292,76.305 50.568,76.581 v1(69.215,76.581)
  Bottom Layer w0.254: v1(69.215,76.581) 71.067,76.581 U3.6 U3.5
Pressure-Pin3: R4.1 U2.2 U3.3 | length 35.4
  Top Layer w0.254: U2.2 49.022,71.755 50.165,72.898 65.786,72.898 v1(68.199,70.485)
  Bottom Layer w0.254: v1(68.199,70.485) 68.199,67.437 69.977,65.659 73.511,65.659 73.66,65.808 U3.3 76.493,66.728 R4.1
PRESSURE_DATA: C6.1 J1.J2_15 U4.6 | length 104.5
  Top Layer w0.254: v1(58.674,67.183) 84.709,67.183 88.519,70.993 101.854,70.993 107.442,76.581 107.442,85.29 105.087,87.645 102.675,87.645 102.12,87.09 100.909,87.09 100.203,87.796 U4.6 100.203,90.91 100.352,91.059 C6.1
  Bottom Layer w0.254: J1.J2_15 53.848,51.562 53.848,62.357 v1(58.674,67.183)
PUMP-: D1.2 Q1.2 | length 22.4
  Top Layer w2: D1.2 57.153,86.995 Q1.2 61.722,86.995 63.5,88.773 63.5,92.475 v2(58.702,97.273)
SOLENOID-: D2.2 Q2.2 | length 21.6
  Top Layer w0.254: D2.2 75.314,86.995 Q2.2 80.242,86.995 80.391,87.144 80.391,93.775 v2(76.893,97.273)
pads on no net: J1.J2_1 J1.J2_2 J1.J2_3 J1.J2_4 J1.J2_12 J1.J2_13 J1.J2_18 J1.J3_1 J1.J3_2 J1.J3_3 J1.J3_4 J1.J3_5 J1.J3_7 J1.J3_9 J1.J3_10 J1.J3_11 J1.J3_12 J1.J3_13 J1.J3_14 J1.J3_15 J1.J3_16 J1.J3_17 J1.J3_18 J2.3 SW1.1 SW2.1 SW3.1 SW4.1 U2.1 U2.5 U2.8 U3. U3.2
copper on no net:
  other v3: 29.4,29.4 111.4,29.4 111.4,97.612
  other v4: 29.4,97.612

## Polygon pours and split planes (outlines as drawn)
12V_IN on Top Layer "12V_IN_L01_P000" (solid, pour order 0): 41.021,100.33 99.695,100.33 99.695,86.995 98.933,86.995 98.171,86.995 98.171,89.662 96.774,89.662 96.774,99.314 73.533,99.314 73.533,90.17 70.231,90.17 70.231,99.441 55.372,99.441 55.372,90.17 51.562,90.17 51.562,98.298 44.831,98.298 44.831,81.28 49.911,81.28 49.911,77.089 49.53,77.089 49.53,74.676 48.387,74.676 48.387,76.327 36.195,76.327 36.195,74.168 35.433,73.406 28.575,73.406 28.575,76.2 32.766,80.391 40.513,80.391 40.513,100.305 40.852,100.338
5V_IN on Top Layer "5V_IN_L01_P003" (solid, pour order 3): 28.575,70.866 31.369,70.866 31.369,69.85 35.306,69.85 35.306,67.31 35.687,66.929 48.895,66.929 48.895,65.151 91.44,65.151 91.44,67.945 107.823,67.945 107.823,54.483 101.981,48.641 98.552,48.641 98.552,51.816 103.505,56.769 103.505,66.04 103.505,66.167 103.082,66.802 93.218,66.802 93.218,64.008 92.837,63.627 33.274,63.627 33.274,59.182 33.147,59.055 31.115,59.055 31.115,67.945 28.575,67.945
GND on GND1 (split plane): 114.933,25.91 25.91,25.91 25.91,101.09 114.933,101.09
GND on GND2 (split plane): 114.933,25.91 25.91,25.91 25.91,101.09 114.933,101.09

## Silkscreen, mask and mechanical layers (free items; w line width, h text height)
Top Overlay:
  text "+" at 49.911,96.647 h1.52
  text "-" at 61.849,96.52 h1.52
  text "+" at 68.326,96.52 h1.52
  text "-" at 79.629,96.52 h1.52
  text "PUMP" at 49.149,91.694 h1.52 r90
  text "SOLENOID" at 83.566,88.265 h1.52 r90
  text "SCREEN" at 105.664,68.326 h1.52
  text "+" at 108.966,64.77 h1.52 r90
  text "MISO" at 88.138,63.754 h1.52
  text "CS" at 99.314,63.627 h1.52
  text "-" at 108.458,62.738 h1.52 r180
  text "CLK" at 93.726,56.769 h1.52
  text "DC" at 99.314,54.356 h1.52
  text "MOSI" at 87.884,54.102 h1.52
  text "+" at 101.092,47.625 h1.52 r90
  text "-" at 111.252,47.498 h1.52 r90
  text "DATA" at 87.376,46.863 h1.52
  text "FLUID SENSOR" at 96.774,43.561 h1.52